# Altium PCB bbr18_pc_battery_board.PcbDoc
Units mm, origin at the board's own origin, x right, y up, seen from the top; angles counter-clockwise.
Board outline 57.41 x 45.19 mm, 2 copper layers (Top Layer, Bottom Layer), stack 1.571 mm thick; 45 components, 38 nets, 183 pads, 109 vias.
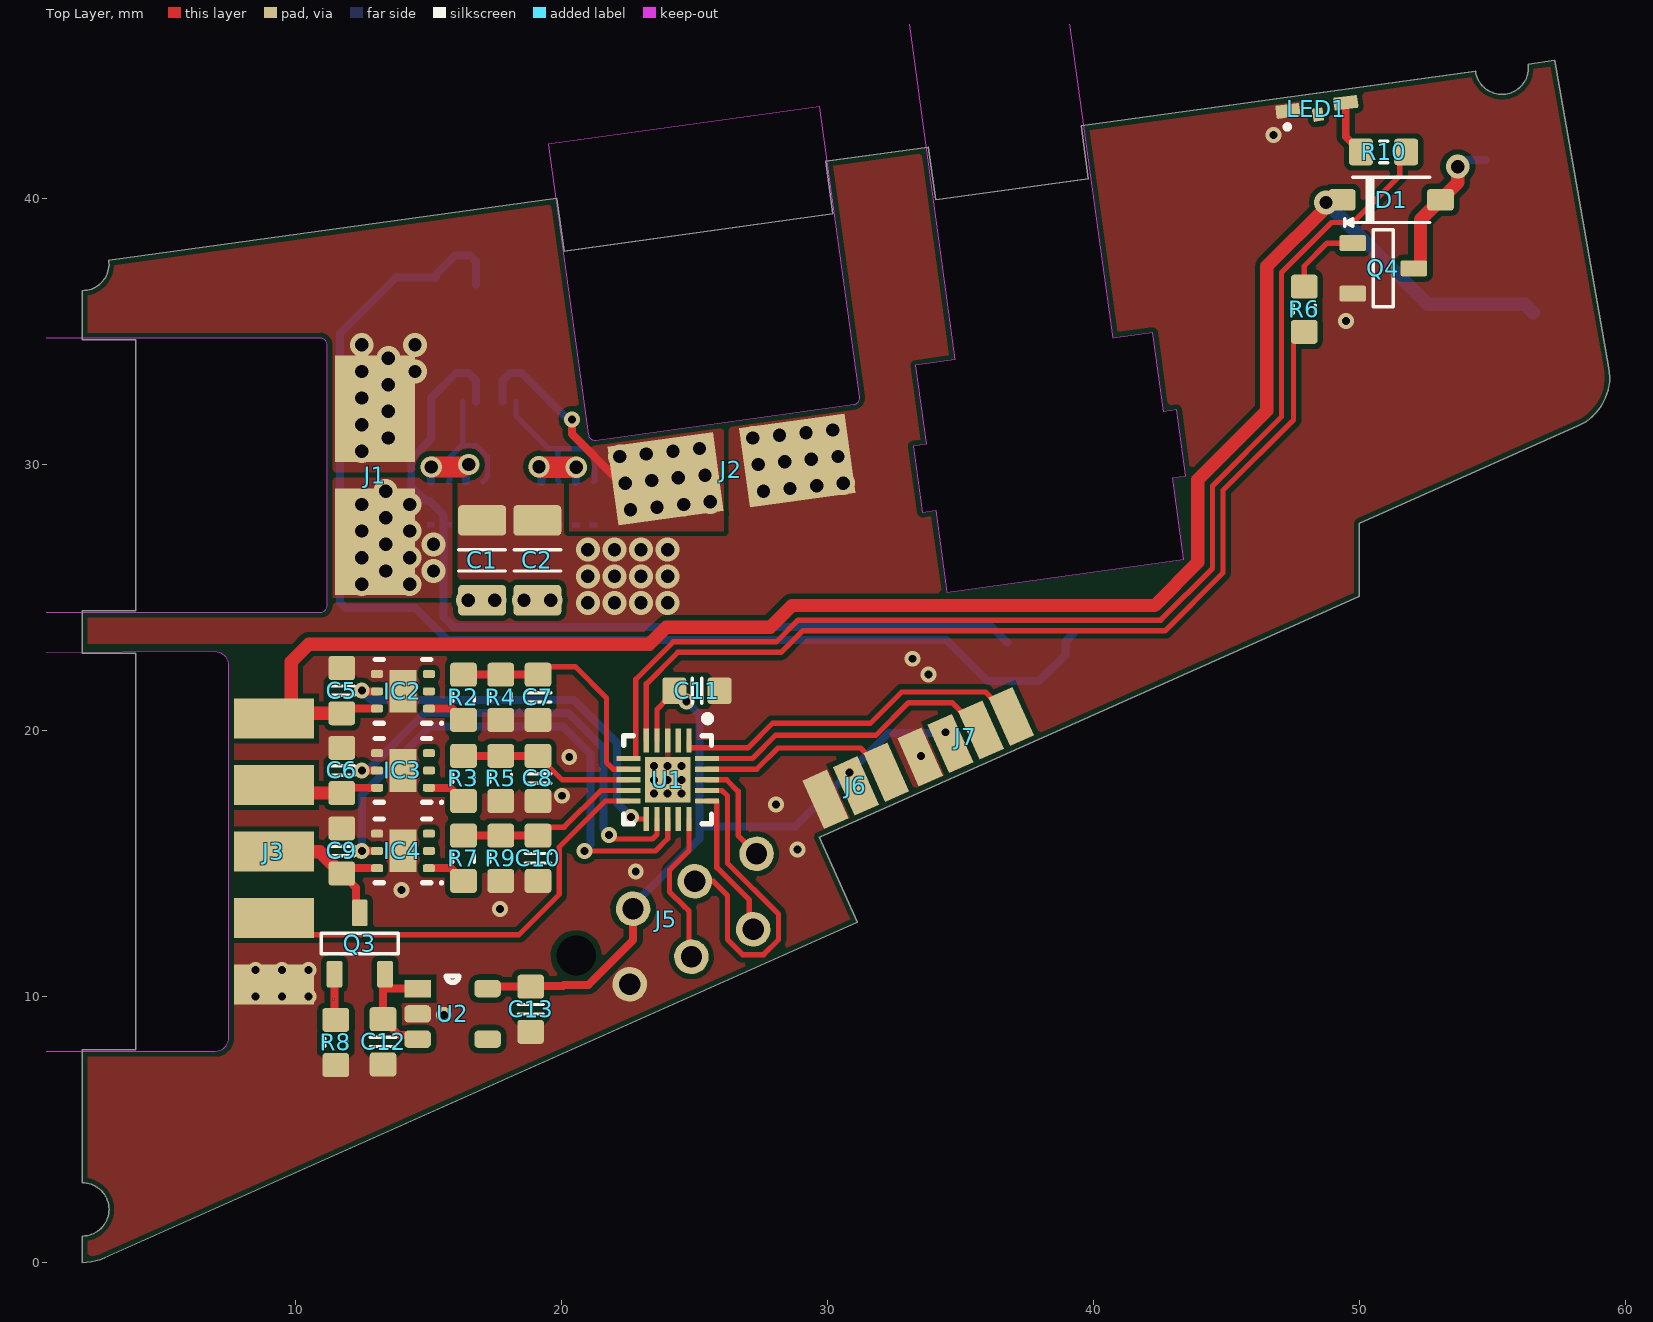
[diagram p0: Top Layer view]
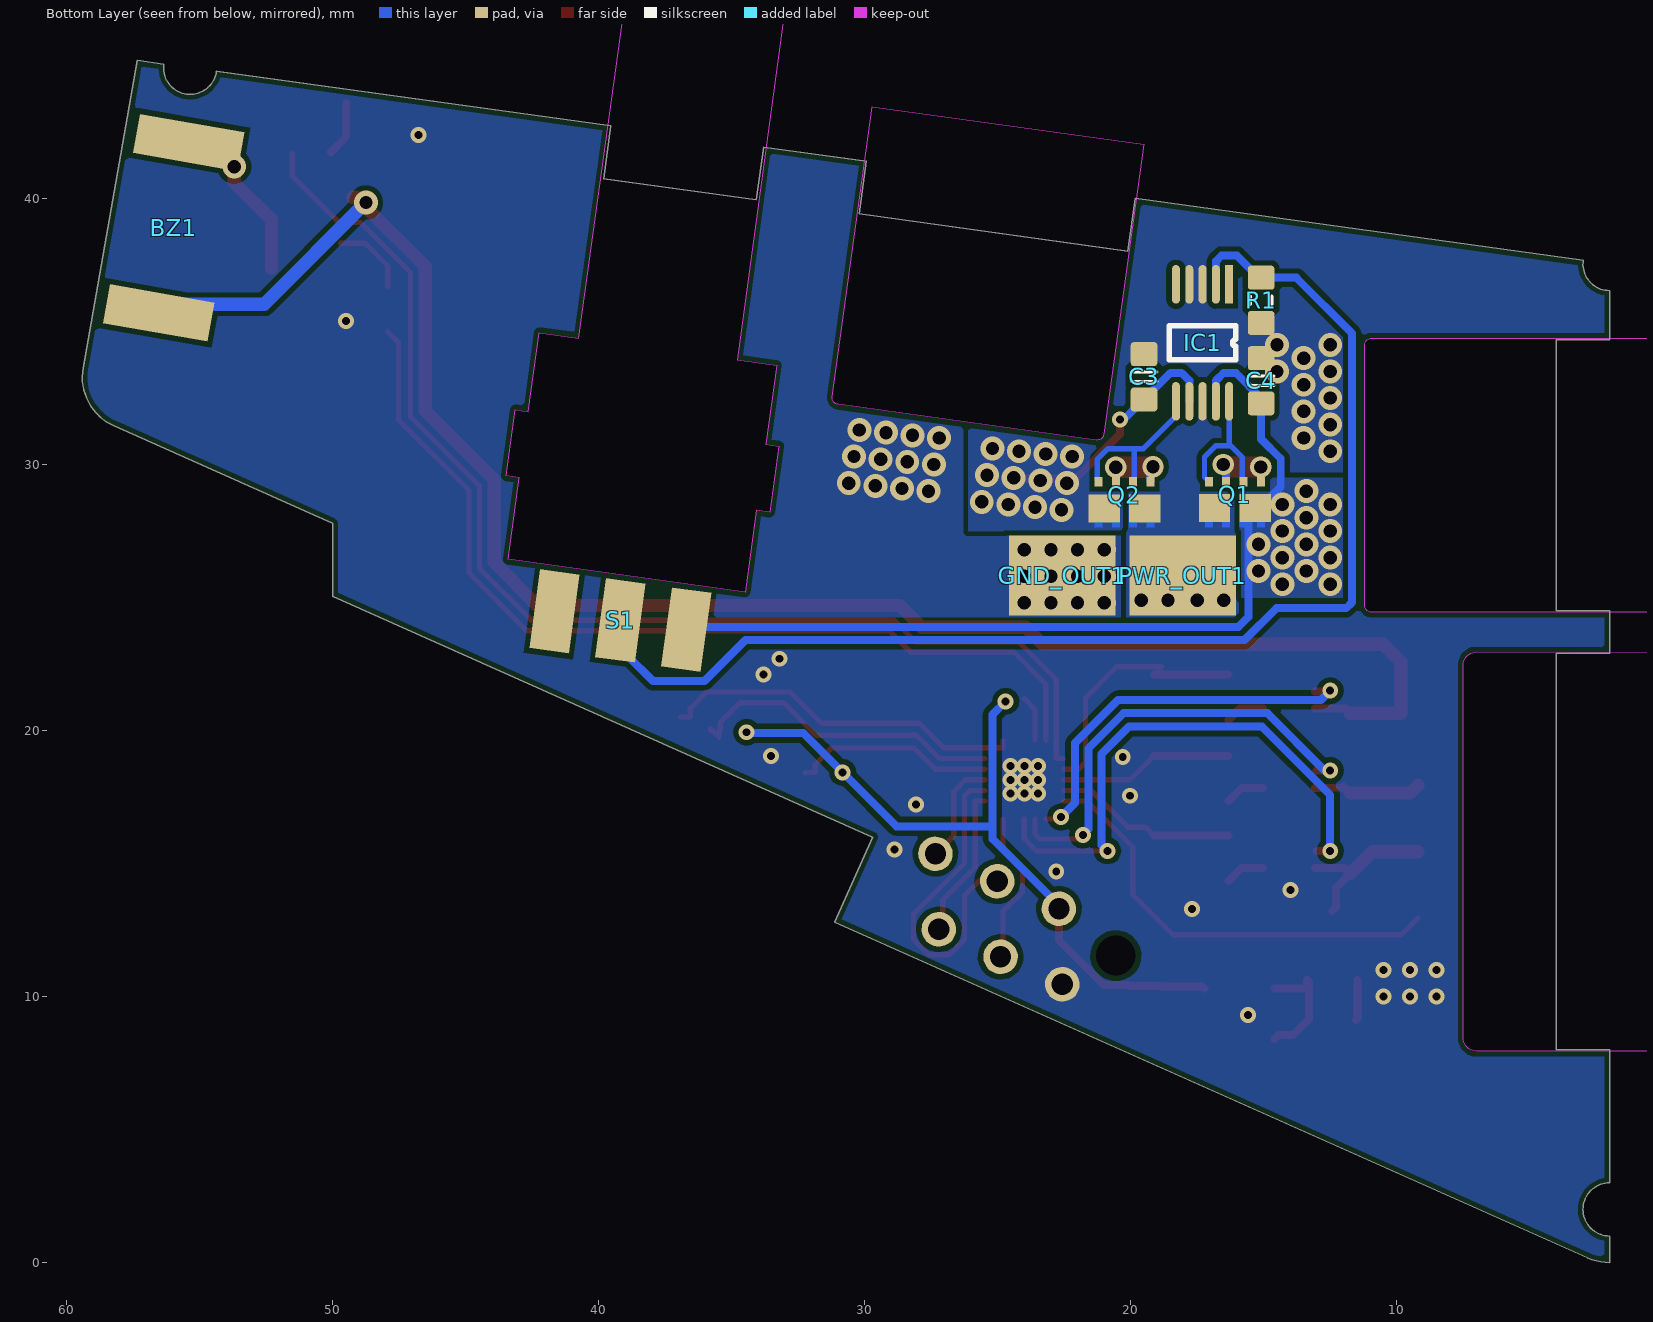
[diagram p1: Bottom Layer view, seen from below]

## Layer stack, top to bottom
Top Solder: solder mask 0.0102, Solder Resist, Dk 3.5
Top Layer: signal copper 0.0356
Dielectric 1: dielectric 1.5, FR-4, Dk 4.8
Bottom Layer: signal copper 0.0356
Bottom Solder: solder mask 0.0102, Solder Resist, Dk 3.5

## Board outline
2,0 ccw(c2,2) 2.815,0.173 31.127,12.8 29.701,15.997 50,25.05 50,27.787 58.224,31.455 ccw(c57.41,33.282) 59.379,33.629 57.341,45.192 56.349,45.055 cw(c55.358,44.918) 54.367,44.781 54.368,44.781 39.543,42.731 39.817,40.75 34.071,39.955 33.797,41.936 29.934,41.402 30.208,39.421 20.104,38.024 19.83,40.005 2.991,37.677 cw(c2,37.54) 2,36.54 2,34.7 4,34.7 4,24.5 2,24.5 2,22.9 4,22.9 4,8 2,8 2,3 cw(c2,2) 2,1

## Design rules (kind name [scope] priority, off if disabled: settings)
BoardOutlineClearance [All] p1: gap=0.2 ignorepadtopadclearanceinfootprint=FALSE except(0: Arc-SplitContinuation Track-SplitContinuation SMDPad-SplitContinuation THPad-SplitContinuation Via-SplitContinuation Fill-SplitContinuation Poly-SplitContinuation Region-SplitContinuation Text-SplitContinuation)
Clearance [All] p1: gap=0.2 ignorepadtopadclearanceinfootprint=TRUE except(0: Arc-Hole Track-Hole SMDPad-Hole THPad-Hole Via-Hole Fill-Hole Poly-Hole Region-Hole Text-Hole)
ComponentClearance ComponentClearanceIgnore [HasFootprint('PADS-3-1020') or HasFootprint('PADS-4-1020')] p1: gap=0 collisioncheckmode=3 verticalgap=0 showdistances=FALSE
ComponentClearance [All] p2: gap=0.2 collisioncheckmode=3 verticalgap=0.2 showdistances=FALSE
HoleToHoleClearance [All] p1: gap=0.2 allowstackedmicrovias=TRUE
PolygonConnect [All] p1: connectstyle=Direct reliefconductorwidth=0.254 reliefentries=4 polygonreliefangle="90 Angle" airgapwidth=0.254
RoomDefinition lipo_alarm [InComponentClass('lipo_alarm')] p1: confinementstyle=ConfineIn formatcopy=TRUE lockcomponents=FALSE outline -21.2,-24 128.9,-24 128.9,82.2 -21.2,82.2
RoomDefinition bbr18_pc_battery_board [InComponentClass('bbr18_pc_battery_board')] p2: confinementstyle=ConfineIn formatcopy=TRUE lockcomponents=FALSE outline -19,-22 125,-22 125,77 -19,77
RoutingVias [All] p1: holewidth=0.3 width=0.6 viastyle="Through Hole" minholewidth=0.3 minwidth=0.6 maxholewidth=5 maxwidth=10
SolderMaskExpansion SolderMaskExpansionTentedVia [IsVia] p1: expansion=-5
SolderMaskExpansion [All] p2: expansion=0.102
Width [All] p1: maxlimit=10 minlimit=0.2 preferedwidth=0.3
28 further rules are at their usual default settings.

## Classes and differential pairs
component class lipo_alarm: BZ1 C5 C6 C7 C8 C9 C10 C11 C12 C13 D1 IC2 IC3 IC4 J3 J5 J6 J7 LED1 Q3 Q4 R2 R3 R4 R5 R6 R7 R8 R9 R10 U1 U2
component class bbr18_pc_battery_board: C1 C2 C3 C4 GND_OUT1 IC1 J1 J2 PWR_OUT1 Q1 Q2 R1 S1

## Components (designator, comment, footprint, x,y, rotation, side; value= is the part's Value field where it differs from the comment)
BZ1 "KXG1212" KXG1212 59,36.135 r10 bottom
C1 "10u 25V" CAPC3216X180N 17.025,26.4 r90 top value=10uF
C2 "10u 25V" CAPC3216X180N 19.1,26.4 r90 top value=10uF
C3 "100n" CAPC1608X90N 19.5,33.3 r90 bottom value=10n
C4 "100n" CAPC1608X90N 15.1,33.15 r90 bottom value=10n
C5 "1u" CAPC1608X90N 11.75,21.5 r90 top value=1µ
C6 "1u" CAPC1608X90N 11.75,18.5 r90 top value=1uF
C7 "100n" CAPC1608X90N 19.125,21.25 r270 top
C8 "100n" CAPC1608X90N 19.125,18.2 r270 top
C9 "1u" CAPC1608X90N 11.75,15.475 r90 top value=1µ
C10 "100n" CAPC1608X90N 19.125,15.2 r270 top
C11 "100n" CAPC1608X90N 25.1,21.5 r0 top
C12 "1u" CAPC1608X90N 13.3,8.3 r270 top
C13 "1u" CAPC1608X90N 18.85,9.525 r270 top
D1 "20V; 1A" SOD123 51.2,39.95 r0 top
GND_OUT1 "HEADER-1" POWER-PAD-4x3 22.573,25.825 r0 bottom
IC1 "LTC4416" MSOP-10 17.3,34.575 r270 bottom
IC2 "TPS22810DRVT" WSON-6 14.05,21.475 r180 top
IC3 "TPS22810DRVT" WSON-6 14.05,18.5 r180 top
IC4 "TPS22810DRVT" WSON-6 14.05,15.475 r180 top
J1 "XT30U" XT30U-PCB-RA-CUTOUT 11.2,29.6 r180 top locked
J2 "XT30U" XT30U-PCB-RA-CUTOUT 26.15,31.593 r97.87 top locked
J3 "BATTERY" JST-XH-5-TH-PCB-CUTOUT 7,20.45 r270 top
J5 "HEADER-6" MICRO-MATCH-FOB-06 22.573,10.463 r204 top
J6 "UPDI" PADS-3-1020 29.933,17.417 r24 top
J7 "UART" PADS-4-1020 33.491,19.008 r24 top
LED1 "Red" LED-0805S-SIDELED-2.1X0.6X1.0 48.4,43.449 r7.87 top
PWR_OUT1 "HEADER-1" POWER-PAD-4x3 18.048,25.825 r180 bottom
Q1 "SI5997DU" POWERPAK-CHIPFET-DUAL 16.086,29.534 r180 bottom
Q2 "SI5997DU" POWERPAK-CHIPFET-DUAL 20.237,29.528 r180 bottom
Q3 "BSS84" SOT23-3 12.425,11.995 r90 top
Q4 "NPM" SOT23-3 50.9,37.375 r0 top
R1 "Thick Film" RESC1608X55N 15.1,36.175 r270 bottom value=100k
R2 "3k" RESC1608X55N 16.325,21.25 r90 top value=20M
R3 "2k" RESC1608X55N 16.325,18.2 r90 top value=20M
R4 "1k" RESC1608X55N 17.725,21.25 r270 top value=20M
R5 "1k" RESC1608X55N 17.725,18.2 r270 top value=20M
R6 "1.5k?" RESC1608X55N 47.931,35.838 r90 top value=20M
R7 "1k" RESC1608X55N 16.325,15.2 r90 top value=20M
R8 "100k" RESC1608X55N 11.525,8.275 r90 top value=20M
R9 "1k" RESC1608X55N 17.725,15.2 r270 top value=20M
R10 "1k" RESC1608X55N 50.912,41.75 r180 top value=20M
S1 "SW-SPDT" A12AP-PCB-CUTOUT 38.95,25.825 r187.87 bottom
U1 "ATTINY416" QFN40P300X300X90_HS-21M 24,18.15 r270 top locked
U2 "LDO-SOT23-5" SOT23-5 14.6,10.3 r0 top

## Footprints (in the part's own frame and the unit in brackets; to place one, negate y for a bottom-side part, rotate by r counter-clockwise, add the part's x,y. Pads: shape width x height; smd on the part's side, far side on the other; paste and mask are expansions set on the pad)
A12AP-PCB-CUTOUT [mm] "A12AP-PCB-CUTOUT"
  rect 1.5x3 smd: 1(-2.5,-1.7) 2(0,-1.7) 3(2.5,-1.7)
  Keep-Out Layer board cut-out: -4.5,0 -4.5,3.1 -5,3.1 -5,5.6 -4.5,5.6 -4.5,8.6 -3,8.6 -3,24 2.969,24 3.001,8.6 4.5,8.6 4.5,5.6 5,5.6 5,3.1 4.5,3.1 4.5,0
  body extent -4.9,-3.1 4.9,21.79, height 2.3
CAPC1608X90N [mm] "Chip Capacitor, Body 1.6x0.8mm, EIA 0603, IPC Medium Density"
  round 0.254 on Mech15: 0(0,0)
  rrect25% 0.9x1 smd: 1(-0.85,0) 2(0.85,0)
  Top Layer pour cut-out: -0.6,0.5 -0.4,0.7 0.4,0.7 0.6,0.5 0.6,-0.5 0.4,-0.7 -0.4,-0.7 -0.6,-0.5
  silkscreen extent -0.18,-0.48 0.18,0.48, body extent -0.85,-0.45 0.85,0.45, height 0.89
CAPC3216X180N [mm] "Chip Capacitor, Body 3.2x1.6mm, 1.8mm H, EIA 1206, IPC Medium Density"
  round 0.508 on Mech15: 0(0,0)
  rrect25% 1.15x1.8 smd: 1(-1.5,0) 2(1.5,0)
  silkscreen extent -0.4,-0.88 0.4,0.88, body extent -1.7,-0.9 1.7,0.9, height 1.8
JST-XH-5-TH-PCB-CUTOUT [mm]
  rect 1.5x3 smd: 1(0,2.2) 2(2.5,2.2) 3(5,2.2) 4(7.5,2.2) 5(10,2.2)
  Keep-Out Layer board cut-out: -2.473,-7 12.5,-7 12.5,0 12.462,0.191 12.354,0.354 12.191,0.462 12,0.5 12,0.5 -2.001,0.5 -2.194,0.461 -2.358,0.352 -2.467,0.187 -2.505,-0.006 -2.505,-0.006
  body extent -2.45,-7 12.45,3.4, height 2.71
KXG1212 [mm]
  rect 4x1.5 smd: 1(-2.5,0) 2(-2.5,-6.5)
  body extent -5.5,-9.25 9.5,2.75, height 6.3
LED-0805S-SIDELED-2.1X0.6X1.0 [mm] "Lite-On Inc PLCC Side LED"
  round 0.508 on Mech15: 0(0,0)
  rrect25% 0.9x0.5 smd: A(1.1,0) K(-1.1,0)
  rrect25% 0.4x0.5 smd: B(0,-0.3)
  Top Layer pour cut-out: -0.508,0.3 0.508,0.3 0.508,-0.3 -0.508,-0.3
  silkscreen extent -1.28,-0.68 -1.12,-0.52, body extent -1.1,-0.3 1.1,0.8, height 0.7
MICRO-MATCH-FOB-06 [mm]
  round 1.3 hole 0.8: 1(0,0) 2(-1.27,-2.54) 3(-2.54,0) 4(-3.81,-2.54) 5(-5.08,0) 6(-6.35,-2.54)
  round 0 hole 1.5 unplated: drill(1.4,-1.8)
  body extent -7.95,-3.77 1.6,1.23, height 4
MSOP-10 [mm]
  rect 1.45x0.3 smd: 1(-2.2,1)
  oval 1.45x0.3 smd: 2(-2.2,0.5) 3(-2.2,0) 4(-2.2,-0.5) 5(-2.2,-1) 6(2.2,-1) 7(2.2,-0.5) 8(2.2,0) 9(2.2,0.5) 10(2.2,1)
  silkscreen extent -0.64,-1.25 0.64,1.25, body extent -2.47,-1.5 2.43,1.5, height 1.15
PADS-3-1020 [mm]
  rect 1x2 smd: 1(0,0) 2(1.25,0) 3(2.5,0)
PADS-4-1020 [mm]
  rect 1x2 smd: 1(0,0) 2(1.25,0) 3(2.5,0) 4(3.75,0)
POWER-PAD-4x3 [mm]
  rect 4x3 smd: 1(0,0)
POWERPAK-CHIPFET-DUAL [mm]
  rect 1.175x1.05 smd: D1(0.763,-1.175) D2(-0.763,-1.175)
  rect 0.3x0.35 smd: G1(0.325,-0.175) G2(-0.975,-0.175) S1(0.975,-0.175) S2(-0.325,-0.175)
  Top Layer region: 0.825,-1.7 1.125,-1.7 1.125,-1.9 0.825,-1.9
  Top Layer region: 0.175,-1.7 0.475,-1.7 0.475,-1.9 0.175,-1.9
  Top Layer region: -0.475,-1.7 -0.175,-1.7 -0.175,-1.9 -0.475,-1.9
  Top Layer region: -1.125,-1.7 -0.825,-1.7 -0.825,-1.9 -1.125,-1.9
  body extent -1.5,-1.9 1.5,0, height 0.75
QFN40P300X300X90_HS-21M [mm] "QFN, 20-Leads, Body 3,00x3,00mm, Pitch 0,40mm, Thermal Pad 1,70x1,70mm, IPC Low Density"
  rect 0.9x0.2 smd: 1(-1.475,0.8) 2(-1.475,0.4) 3(-1.475,0) 4(-1.475,-0.4) 5(-1.475,-0.8) 11(1.475,-0.8) 12(1.475,-0.4) 13(1.475,0) 14(1.475,0.4) 15(1.475,0.8)
  rect 0.2x0.9 smd: 6(-0.8,-1.475) 7(-0.4,-1.475) 8(0,-1.475) 9(0.4,-1.475) 10(0.8,-1.475) 16(0.8,1.475) 17(0.4,1.475) 18(0,1.475) 19(-0.4,1.475) 20(-0.8,1.475)
  rect 1.7x1.7 smd: 21(0,0)
  silkscreen extent -2.42,-1.65 1.65,1.65, body extent -1.5,-1.5 1.5,1.5, height 0.9
RESC1608X55N [mm] "Chip Resistor, Body 1.6x0.8mm, EIA 0603, IPC Medium Density"
  round 0.254 on Mech15: 0(0,0)
  rrect25% 0.9x1 smd: 1(-0.85,0) 2(0.85,0)
  Top Layer pour cut-out: -0.6,0.5 -0.4,0.7 0.4,0.7 0.6,0.5 0.6,-0.5 0.4,-0.7 -0.4,-0.7 -0.6,-0.5
  silkscreen extent -0.15,-0.41 0.15,0.41, body extent -0.87,-0.47 0.88,0.48, height 0.54
SOD123 [mm] "SOD-123; 2 Leads; Body 2.7 x 1.6 mm, (LxW)"
  round 0.508 on Mech15: 0(0,0)
  rrect25% 1x0.8 smd: A(1.85,0) K(-1.85,0)
  silkscreen extent -1.75,-1 1.45,0.85, body extent -1.95,-0.9 1.95,0.9, height 1.18
SOT23-3 [mm] "SOT23, 3 pin"
  round 0.5 on Mech15: 0(0,0)
  rrect25% 1x0.6 smd: 1(-1.15,0.95) 2(-1.15,-0.95) 3(1.15,0)
  silkscreen extent -0.38,-1.45 0.38,1.45, body extent -1.4,-1.45 1.4,1.45, height 1.29
SOT23-5 [mm]
  rect 1x0.66 smd: 1(0,0)
  rrect50% 1x0.66 smd: 2(0,-0.95) 3(0,-1.9) 4(2.63,-1.9) 5(2.63,0)
  silkscreen extent 1.08,0.24 1.55,0.48, body extent 0.1,-2.47 2.6,0.53, height 1.11
WSON-6 [mm] "SON, 6-Leads, Body 2,00x2,00mm, Pitch 0,65mm, Thermal Pad 1,60x1mm, IPC Medium Density"
  rrect50% 0.45x0.3 smd: 1(-0.975,0.65) 2(-0.975,0) 3(-0.975,-0.65) 4(0.975,-0.65) 5(0.975,0) 6(0.975,0.65)
  rect 1x1.6 smd: 7(0,0)
  silkscreen extent -1.5,-1.2 1.05,1.25, body extent -1.01,-1 1.01,1, height 0.8
XT30U-PCB-RA-CUTOUT [mm]
  rect 3x4 smd: 1(-1.8,-2.5) 2(-1.8,2.5)
  Keep-Out Layer board cut-out: 11.25,-5.15 11.25,5.15 0.25,5.15 0.125,5.116 0.034,5.025 0,4.9 0,4.9 0,-4.9 0.034,-5.025 0.125,-5.116 0.25,-5.15 0.25,-5.15
  body extent -2.5,-5.1 11.2,5.1, height 2.82

## Part data
BZ1: library part BUZZER
C1 C2: library part CAPC_6n8_1206_NP0_50V, "Capacitor SMD Cer 6.8nF 5% 50V NP0 1206", Manufacturer 1="TDK Corporation", Manufacturer Part Number 1=C3216C0G1H682J/0.60, Package / Case="1206 (3216 metric)", Ratings=25V, Supplier Part Number 1=445-4005-1-ND, Tolerance=±5%, Material="Ceramic NP0", SCDType=spec, Supplier 1=Digi-Key
C3 C4: library part CAPC_10n_0603_X7R_50V_10%, "Capacitor SMD Cer 10nF 10% 50V X7R 0603", Manufacturer 1="TDK Corporation", Manufacturer 2="AVX Corporation", Manufacturer Part Number 1=C1608X7R1H103K, Manufacturer Part Number 2=06035C103KAT2A, Package / Case="0603 (1608 metric)", Ratings="50V; X7R", Supplier Part Number 1=445-1311-1-ND, Tolerance=±10%, ComponentLink1Description=http://product.tdk.com/capacitor/mlcc/en/documents/mlcc_commercial_general_en.pdf, ComponentLink1URL=http://product.tdk.com/capacitor/mlcc/en/documents/mlcc_commercial_general_en.pdf, ComponentLink2Description=http://www.avx.com/docs/Catalogs/cx7r.pdf, ComponentLink2URL=http://www.avx.com/docs/Catalogs/cx7r.pdf, Material=ceramic, SCDType=spec, Supplier 1=Digi-Key, Supplier 2=Digi-Key, Supplier Part Number 2=478-1227-1-ND
C5 C9: library part CAPC_1u_0603_X7R_16V_10%, "Capacitor SMD Cer 1uF 10% 16V X7R 0603", Manufacturer 1="TDK Corporation", Manufacturer Part Number 1=C1608X7R1C105K, Package / Case="0603 (1608 metric)", Ratings="16V; X7R", Supplier Part Number 1=445-1604-1-ND, Tolerance=±10%, ComponentLink1Description=http://product.tdk.com/capacitor/mlcc/en/documents/mlcc_commercial_general_en.pdf, ComponentLink1URL=http://product.tdk.com/capacitor/mlcc/en/documents/mlcc_commercial_general_en.pdf, Material=ceramic, SCDType=spec, Supplier 1=Digi-Key
C6: library part CAPC_100n_0603_X7R_50V_10%, "Capacitor SMD Cer 1uF 10% 50V X7R 0603", Manufacturer 1="AVX Corporation", Manufacturer 2="TDK Corporation", Manufacturer Part Number 1=06035C104KAT2A, Manufacturer Part Number 2=C1608X7R1H104K, Package / Case="0603 (1608 Metric)", Ratings="50V; X7R", Supplier Part Number 1=478-5052-1-ND, Tolerance=±10%, ComponentLink1Description=http://www.avx.com/docs/Catalogs/cx7r.pdf, ComponentLink1URL=http://www.avx.com/docs/Catalogs/cx7r.pdf, ComponentLink2Description=http://product.tdk.com/capacitor/mlcc/en/documents/mlcc_commercial_general_en.pdf, ComponentLink2URL=http://product.tdk.com/capacitor/mlcc/en/documents/mlcc_commercial_general_en.pdf, Material=ceramic, SCDType=spec, Supplier 1=Digi-Key, Supplier 2=Digi-Key, Supplier Part Number 2=445-1314-1-ND
C7 C8 C10 C11: library part CAPC_100n_0603_X7R_50V_10%, "Capacitor SMD Cer 100nF 10% 50V X7R 0603", Manufacturer 1="AVX Corporation", Manufacturer 2="TDK Corporation", Manufacturer Part Number 1=06035C104KAT2A, Manufacturer Part Number 2=C1608X7R1H104K, Package / Case="0603 (1608 Metric)", Ratings="50V; X7R", Supplier Part Number 1=478-5052-1-ND, Tolerance=±10%, ComponentLink1Description=http://www.avx.com/docs/Catalogs/cx7r.pdf, ComponentLink1URL=http://www.avx.com/docs/Catalogs/cx7r.pdf, ComponentLink2Description=http://product.tdk.com/capacitor/mlcc/en/documents/mlcc_commercial_general_en.pdf, ComponentLink2URL=http://product.tdk.com/capacitor/mlcc/en/documents/mlcc_commercial_general_en.pdf, Material=ceramic, SCDType=spec, Supplier 1=Digi-Key, Supplier 2=Digi-Key, Supplier Part Number 2=445-1314-1-ND
C12 C13: library part CAPC_2u2_0603_10V_10%, "Capacitor SMD Cer 2.2uF 10% 10V X5R 0603", Manufacturer 1="AVX Corporation", Manufacturer Part Number 1=0603ZD225KAT2A, Package / Case="0603 (1608 metric)", Ratings="10V; X5R", Supplier Part Number 1=478-6212-1-ND, Tolerance=±10%, ComponentLink1Description=http://www.avx.com/docs/Catalogs/cx5r.pdf, ComponentLink1URL=http://www.avx.com/docs/Catalogs/cx5r.pdf, Material=ceramic, SCDType=spec, Supplier 1=Digi-Key
D1: library part DIODE_SCHOTTKY_40V_1A, "Diode Schottky SMD 20V 1A SOD123", Manufacturer 1="Diodes Inc", Manufacturer Part Number 1=1N5819HW-7-F, Package / Case=SOD123, Ratings="40V; 1A", Supplier Part Number 1=1N5819HW-FDICT-ND, Diode Type=Schottky, Material=Si, Mounting Type="Surface Mount", SCDType=spec, Supplier 1=Digi-Key
IC1: "PowerPath Controller, 3.6-36V, MSOP-10, LTC4416, Linear Technology", Case/Package=MSOP-10, Manufacturer="Analog Devices / Linear Technology", Manufacturer Part Number=LTC4416EMS#PBF, Operating Temperature Range="-40°C .. 85°C", Supplier Part Number 1=584-LTC4416EMS#PBF, Supply Voltage Range="3.6V .. 36V", ComponentLink4Description=Datasheet, ComponentLink4URL=https://datasheet.ciiva.com/1960/17899-1960765.pdf, Number of Drivers=2, Supplier 1=Mouser, Supplier 2=TME, Supplier Part Number 2=LTC4416EMSPBF
IC2 IC3 IC4: "Power Load Switch, 18Vin, 3A, 0.079R, WSON-6, High Side,  TPS22810, TEXAS INSTRUMENTS", Input Voltage Range="2.7V .. 18V", Manufacturer="Texas Instruments", On-Resistance=0.079R, Operating Temperature Range="-40°C .. 105°C", Package=WSON-6, Supplier Part Number 1=2769481, ComponentLink1Description=Datasheet, ComponentLink1URL=http://www.ti.com/lit/ds/symlink/tps22810.pdf, Manufacturer Part Number=TPS22810DRVT, Number of Channels=1, Supplier 1=Farnell, Supplier 2=Mouser, Supplier Part Number 2=595-TPS22810DRVT
J3: library part HEADER-5
J6: library part HEADER-3
J7: library part HEADER-4
LED1: library part LED_SMD_RED_0805RA_250mcd, "LED SMD SIDELED Red 630nm 250mcd 0805", Manufacturer 1="Kingbright Corp", Manufacturer Part Number 1=APA2106SURCK, Package / Case="2.1x0.6x1.0mm SIDELED", Ratings="250 mcd; 630 nm", Supplier Part Number 1=754-1060-1-ND, Color=Red, Material=Al-InGaN, SCDType=spec, Supplier 1=Digi-Key
Q1 Q2: "MOSFET, DUAL P-CHANNEL, 30Vin, 6A, 0.054R, SI5997DU-T1-GE3, PowerPAK ChipFET Dual", Continuous Drain Current (ID)=5.1A, Drain to Source Voltage (Vdss)=-30V, Gate to Source Voltage (Vgs)=20V, Manufacturer="Vishay Siliconix", Manufacturer Part Number=SI5997DU-T1-GE3, Max Power Dissipation=10.4W, Power Dissipation=2.3W, Supplier Part Number 1=2056727, Threshold Voltage=-1.2V, ComponentLink1Description=Datasheet, ComponentLink1URL=https://datasheet.ciiva.com/11159/si5997du-11159553.pdf, Element Configuration=Dual, Rds On Max=54mR, Supplier 1=Farnell, Supplier 2=Mouser, Supplier Part Number 2=78-SI5997DU-T1-GE3
Q3: library part MOSFET_BSS84, "MOSFET SMD P-CH 50V 130mA SOT23-3", Current - Continuous Drain (Id) @ 25° C=130mA, Drain to Source Voltage (Vdss)=50V, Input Capacitance (Ciss) @ Vds="73pF @ 25V", Manufacturer 1="Fairchild Semiconductor", Package / Case=SOT23-3, Power - Max=360mW, Ratings="50V; 130mA", Supplier Device Package=SOT-23, Supplier Part Number 1=BSS84CT-ND, ComponentLink1Description=http://www.fairchildsemi.com/ds/BS/BSS84.pdf, ComponentLink1URL=http://www.fairchildsemi.com/ds/BS/BSS84.pdf, FET Feature="Logic Level Gate", FET Type="MOSFET P-Channel, Metal Oxide", Gate Charge (Qg) @ Vgs="1.3nC @ 5V", Manufacturer Part Number 1=BSS84, Material="Metal Oxide", Rds On (Max) @ Id, Vgs="10 Ohm @ 100mA, 5V", SCDType=undef, Supplier 1=Digi-Key, Vgs(th) (Max) @ Id="2V @ 1mA"
Q4: library part NPN_FMMT617TA, "Transistor SMD NPN 15V 3A SOT-23", Manufacturer 1=Diodes/Zetex, Manufacturer Part Number 1=FMMT617TA, Package / Case=SOT-23, Ratings="15V; 3A; 625mW", Supplier Part Number 1=FMMT617CT-ND, SCDType=spec, Supplier 1=Digi-Key
R1: library part RES_100K_0603_1%, "Resistor SMD chip 100k Ohm 0.1W 1% 0603", Manufacturer 1=Vishay/Dale, Manufacturer Part Number 1=CRCW0603100KFKEA, Package / Case="0603 (2012 metric)", Ratings=1/10W, Supplier Part Number 1=541-100KHCT-ND, Tolerance=±1%, SCDType=spec, Supplier 1=Digi-Key
R2 R3 R4 R5 R6 R7 R8 R9 R10: library part RES_1K_0603_5%, "Resistor SMD chip 1k Ohm 0.1W 5% 0603", Manufacturer 1=Yageo, Manufacturer 2="Vishay Dale", Manufacturer Part Number 1=RC0603JR-071KL, Manufacturer Part Number 2=CRCW06031K00JNEA, Package / Case="0603 (1608 metric)", Ratings="1/10 W", Supplier Part Number 1=311-1.0KGRCT-ND, Tolerance=±5%, ComponentLink1Description=http://www.yageo.com/documents/recent/PYu-RC0603_51_RoHS_L_4.pdf, ComponentLink1URL=http://www.yageo.com/documents/recent/PYu-RC0603_51_RoHS_L_4.pdf, ComponentLink2Description=http://www.vishay.com/doc?20008, ComponentLink2URL=http://www.vishay.com/doc?20008, Material="Thick Film", SCDType=spec, Supplier 1=Digi-Key, Supplier 2=Digi-Key, Supplier Part Number 2=541-1.0KGCT-ND

## Via types
v1: diameter 0.9, hole 0.5, Top Layer to Bottom Layer, 67 vias
v2: diameter 0.6, hole 0.3, Top Layer to Bottom Layer, 38 vias
v3: diameter 0.8, hole 0.5, Top Layer to Bottom Layer, 4 vias

## Nets (pads, with @x,y where several pads share a name; then routed paths per layer and width w, separated by ;. In a path a pad name is that pad's centre, name@x,y a point inside that pad or via, vN(x,y) a via of type N, cw(c..) or ccw(c..) an arc to the next point about the centre after c; other vN are vias at no path point)
5V: C11.1 C13.1 J5.2 J6.2 J7.2 U1.4 U2.5 | length 28.9
  Top Layer w0.2: U1.4 23.6,20.8 C11.1@24,21.2
  Top Layer w0.3: U2.5 17.305,10.375 C13.1 18.875,10.4 20.068,10.4 20.106,10.438 21.017,10.438 22.7,12.121 J5.2
  Bottom Layer w0.3: J5.2 22.7,13.43 25.2,15.93 25.2,20.6 v2(24.7,21.1) ; 25.25,16.4 28.8,16.4 v2(30.827,18.426) 32.3,19.9 34.436,19.9 v2(34.436,19.937)
ADC2: C10.1 R7.2 R9.1 U1.9 | length 6.9
  Top Layer w0.2: C10.1 19.444,16.369 20.106,16.369 21.488,17.75 U1.9
  Top Layer w0.3: R7.2 C10.1
ADC3: C8.1 R3.2 R5.1 U1.8 | length 6.6
  Top Layer w0.2: C8.1 20.025,18.15 U1.8
  Top Layer w0.3: R3.2 C8.1
ADC4: C7.1 R2.2 R4.1 U1.7 | length 9.9
  Top Layer w0.2: C7.1 18.827,22.398 20.533,22.398 21.7,21.231 21.7,18.801 21.951,18.55 U1.7
  Top Layer w0.3: R2.2 C7.1
AUX+: C3.1 IC1.7 J2.2 Q2.D2 | length 9
  Top Layer w0.3: v2(20.4,31.7) 20.4,31.147 22.079,29.467 J2.2
  Bottom Layer w0.3: IC1.7 17.8,33.157 18.093,33.45 18.507,33.45 19.5,32.457 C3.1 20.25,31.7 v2(20.4,31.7)
  other v1: 22.6,28.3 23.6,28.4 24.6,28.5 25.6,28.6 22.4,29.3 23.4,29.4 24.4,29.5 25.4,29.6 22.2,30.3 23.2,30.4 24.2,30.5 25.2,30.6
BAT+: C4.1 IC1.9 J1.2 Q1.D1 S1.3 | length 33.7
  Bottom Layer w0.3: IC1.9 16.8,33.157 16.507,33.45 16.05,33.45 15.1,32.5 C4.1 15.1,30.959 14.361,30.22 14.361,29.167 14.874,28.654 15.028,28.654 15.291,28.391 Q1.D1 15.575,28.107 15.575,24.278 15.953,23.9 36.178,23.9 S1.3@36.775,23.303
  other v1: 12.5,25.5 14.3,25.5 13.4,26 15.2,26 12.5,26.5 14.3,26.5 13.4,27 15.2,27 12.5,27.5 14.3,27.5 13.4,28 12.5,28.5 14.3,28.5 13.4,29
BZ_PWM: R6.1 U1.5 | length 35.9
  Top Layer w0.2: U1.5 23.2,21.758 24.38,22.939 28.255,22.939 29.066,23.75 42.696,23.75 44.878,25.932 44.878,29.035 47.525,31.682 47.525,34.582 R6.1
EN1: IC1.2 R1.1 S1.2 | length 47.3
  Bottom Layer w0.3: R1.1@15.3,37.025 R1.1@15.18,37.025 ; IC1.2 16.8,37.645 16.595,37.85 16.005,37.85 R1.1@15.18,37.025 ; S1.2@39.251,23.646 38.95,23.344 38.95,22.85 37.96,21.86 36.024,21.86 34.484,23.4 15.725,23.4 14.525,24.6 11.9,24.6 11.7,24.8 11.675,24.825 11.675,34.925 13.775,37.025 R1.1 R1.1@15.18,37.025
EN_S2: IC4.5 U1.13 | length 20.5
  Top Layer w0.2: v2(20.875,15.476) 23.541,15.476 24,15.935 U1.13
  Top Layer w0.3: v2(12.501,15.476) IC4.5@13.025,15.476
  Bottom Layer w0.3: v2(12.501,15.476) 12.501,17.582 15.071,20.152 20.067,20.152 21.097,19.123 21.097,15.697 v2(20.875,15.476)
EN_S3: IC3.5 U1.12 | length 16.9
  Top Layer w0.2: v2(21.801,16.076) 21.952,15.925 23.424,15.925 23.6,16.101 U1.12
  Top Layer w0.3: v2(12.501,18.501) IC3.5@13.024,18.501
  Bottom Layer w0.3: v2(12.501,18.501) 12.713,18.501 14.864,20.652 20.274,20.652 21.597,19.33 21.597,16.304 v2@21.801,16.1
EN_S4: IC2.5 U1.11 | length 14.5
  Top Layer w0.2: v2@22.75,16.675 U1.11
  Top Layer w0.3: v2(12.501,21.501) 12.475,21.475 IC2.5
  Bottom Layer w0.3: v2(12.501,21.501) 12.849,21.152 20.481,21.152 22.097,19.537 22.097,17.278 v2(22.625,16.75)
G1: IC1.10 Q1.G1 Q1.G2 | length 5.4
  Bottom Layer w0.2: Q1.G1 15.811,29.409 15.811,30.277 16.244,30.709 16.324,30.709 ; IC1.10 16.3,30.733 16.324,30.709 ; Q1.G2 17.226,29.524 17.226,30.291 16.816,30.701 16.734,30.701 16.726,30.709 16.324,30.709
G2: IC1.6 Q2.G1 Q2.G2 | length 6.3
  Bottom Layer w0.2: IC1.6 18.3,31.825 19.528,30.597 19.862,30.597 ; Q2.G1 19.862,29.403 19.862,30.597 ; Q2.G2 21.262,29.403 21.262,30.187 20.852,30.597 19.862,30.597
GND: C5.2 C6.2 C7.2 C8.2 C9.2 C10.2 C11.2 C12.2 C13.2 IC2.4 IC2.7 IC3.4 IC3.7 IC4.4 IC4.7 J3.5 J5.1 J6.1 J7.1 LED1.K Q4.2 R4.2 R5.2 R8.1 R9.2 U1.3 U1.21 U2.2
  other v2: 15.6,9.3 8.5,10 9.5,10 10.5,10 8.5,11 9.5,11 10.5,11 17.7,13.3 14,14 22.8,14.7 28.875,15.525 28.066,17.225 20.025,17.55 24,17.639 24.519,17.639 23.494,17.642 23.483,18.15 24,18.15 24.519,18.15 23.483,18.664 24,18.664 24.525,18.675 20.3,19 33.525,19.05 33.8,22.1 33.2,22.7 49.5,35.4 46.775,42.382
LED_PWM: R10.1 U1.6 | length 45.7
  Top Layer w0.2: U1.6 22.8,18.95 22.8,21.924 24.215,23.339 28.089,23.339 28.9,24.15 42.531,24.15 44.478,26.098 44.478,29.201 47.075,31.797 47.075,37.222 48.953,39.1 49.766,39.1 51.525,40.859 R10.1@51.525,41.707
MISO: J5.5 U1.16 | length 5.8
  Top Layer w0.2: U1.16 25.85,17.35 25.85,14.847 27.071,13.626 27.071,12.671 J5.5
MOSI: J5.4 U1.17 | length 12.5
  Top Layer w0.2: J5.4 25.717,14.333 26.25,13.8 26.25,12.149 26.82,11.579 27.607,11.579 28.164,12.136 28.164,13.099 26.25,15.013 26.25,17.549 26.049,17.75 U1.17
NetBZ1_2: BZ1.2 D1.A Q4.3 | length 5.6
  Top Layer w0.5: Q4.3@52.3,37.375 52.3,39.2 53.7,40.6 v1(53.7,41.2)
  Bottom Layer w0.3: v1(53.7,41.2) 53.731,41.2 53.975,41.444 BZ1.2@54.751,41.444
NetIC2_1: IC2.1 R2.1 | length 1.5
  Top Layer w0.3: IC2.1 15.9,20.825 R2.1
NetIC3_1: IC3.1 R3.1 | length 1.5
  Top Layer w0.3: IC3.1 15.825,17.85 R3.1
NetIC4_1: IC4.1 R7.1 | length 1.5
  Top Layer w0.3: IC4.1 15.85,14.825 ; 15.85,14.825 R7.1
NetLED1_A: LED1.A R10.2 | length 2.1
  Top Layer w0.3: LED1.A 49.49,42.323 R10.2
NetQ1_S1: Q1.S1 Q1.S2 | length 2.7
  Top Layer w0.6: v3@16.261,29.909 v3@16.411,30.059
  Top Layer w0.8: v3(15.111,29.909) v3@16.261,29.909
  Bottom Layer w0.3: Q1.S1 v3(15.111,29.909) v3@15.111,30.034 ; Q1.S2 v3@16.411,30.022
  other v3: 16.526,30.001
NetQ2_S1: Q2.S1 Q2.S2 | length 2.7
  Top Layer w0.8: v3(19.162,29.922) 19.187,29.897 v3(20.562,29.897)
  Bottom Layer w0.3: Q2.S1 v3@19.262,29.997 ; Q2.S2 v3(20.562,29.897) v3@20.562,29.997
NetQ3_1: Q3.1 R8.2 | length 1.5
  Top Layer w0.3: Q3.1@11.475,10.625 11.475,9.175 R8.2
NetQ4_1: Q4.1 R6.2 | length 2.9
  Top Layer w0.2: R6.2 47.931,37.466 48.79,38.325 Q4.1@49.7,38.325
PGND: C1.2 C2.2 C3.2 C4.2 GND_OUT1.1 IC1.3 IC1.4 J1.1 J2.1 R1.2
  other v1: 21,24.8 22,24.8 23,24.8 24,24.8 21,25.8 22,25.8 23,25.8 24,25.8 21,26.8 22,26.8 23,26.8 24,26.8 27.6,29 28.6,29.1 29.6,29.2 30.6,29.3 27.4,30 28.4,30.1 29.4,30.2 30.4,30.3 12.5,30.5 13.5,31 27.2,31 28.2,31.1 29.2,31.2 30.2,31.3 12.5,31.5 13.5,32 12.5,32.5 13.5,33 12.5,33.5 14.5,33.5 13.5,34 12.5,34.5 14.5,34.5
PWR_OUT: C1.1 C2.1 IC1.8 PWR_OUT1.1 Q1.D2 Q2.D1
  other v1: 16.5,24.9 17.5,24.9 18.6,24.9 19.6,24.9
RX: J7.4 U1.1 | length 13.9
  Top Layer w0.2: U1.1 24.8,19.35 27.019,19.35 27.944,20.275 31.625,20.275 32.8,21.45 35.941,21.45 36.557,20.834 36.557,20.508 J7.4@36.942,20.508
S1: J3.4 U1.10 | length 16.7
  Top Layer w0.2: J3.4 9.825,12.325 18.408,12.325 19.925,13.842 19.925,15.622 21.653,17.35 U1.10
S2: C9.1 IC4.6 J3.3 Q3.3 | length 6
  Top Layer w0.3: Q3.3@12.425,13.225 12.275,13.375 12.275,14.1 C9.1 11.95,14.825 IC4.6
  Top Layer w0.5: J3.3 10.925,15.45 C9.1
S2_OUT: C12.1 Q3.2 U2.1 U2.3 | length 4.7
  Top Layer w0.3: U2.3 14.45,8.55 13.9,8.55 C12.1 13.3,10.55 13.375,10.625 13.375,10.3 U2.1
S3: C6.1 IC3.6 J3.2 | length 4.1
  Top Layer w0.3: C6.1 12,17.9 12.049,17.851 12.77,17.851 12.771,17.85 IC3.6
  Top Layer w0.5: J3.2 9.5,17.65 C6.1
S4: BZ1.1 C5.1 D1.K IC2.6 J3.1 | length 66.5
  Top Layer w0.3: C5.1 11.925,20.825 IC2.6
  Top Layer w0.5: C5.1 9.85,20.65 9.85,22.589 10.511,23.25 23.309,23.25 23.948,23.889 27.861,23.889 28.672,24.7 42.303,24.7 43.928,26.326 43.928,29.428 46.525,32.025 46.525,37.45 v1@48.75,39.675 ; v1(48.75,39.85) v1@48.75,39.675 ; D1.K@49.25,40.05 49.125,40.05 v1@48.75,39.675
  Bottom Layer w0.5: v1(48.75,39.85) 52.575,36.025 56.214,36.025 BZ1.1
SCK: J5.3 U1.15 | length 5.8
  Top Layer w0.2: U1.15 24.8,15.495 24.07,14.765 24.07,13.94 24.627,13.383 24.642,13.383 24.8,13.225 24.8,11.589 J5.3
SSEL: J5.6 U1.18 | length 4
  Top Layer w0.2: U1.18 26.215,18.15 26.65,17.715 26.65,16.057 J5.6
TX: J7.3 U1.20 | length 12.2
  Top Layer w0.2: U1.20 27.184,18.95 28.06,19.825 31.825,19.825 33.05,21.05 34.691,21.05 35.415,20.326 35.453,19.989 35.48,19.755 35.8,20.075 J7.3@35.8,20
UPDI: J6.3 U1.19 | length 7.7
  Top Layer w0.2: U1.19 27.35,18.55 28.142,19.342 31.249,19.342 31.857,18.734 31.857,18.425 32.225,18.425 J6.3@32.242,18.408
pads on no net: C1.0 C2.0 C3.0 C4.0 C5.0 C6.0 C7.0 C8.0 C9.0 C10.0 C11.0 C12.0 C13.0 D1.0 IC1.1 IC1.5 IC2.2 IC2.3 IC3.2 IC3.3 IC4.2 IC4.3 J5.drill LED1.0 LED1.B Q3.0 Q4.0 R1.0 R2.0 R3.0 R4.0 R5.0 R6.0 R7.0 R8.0 R9.0 R10.0 S1.1 U1.2 U1.14 U2.4

## Polygon pours and split planes (outlines as drawn)
GND on Top Layer "Top Layer-GND" (solid, remove dead copper, pour order 9): -0.003,-2.333 62.326,26.237 59.362,46.172 -0.638,46.172
PGND on Top Layer "Top Layer-PGND" (solid, remove dead copper, pour order 7): 0,40.15 0,23.266 35.318,23.266 35.318,44.232
AUX+ on Top Layer "Top Layer-AUX+" (solid, remove dead copper, pour order 0): 26.1,27.5 22.093,27.5 20.3,27.5 20.3,29.5 21.1,29.5 21.1,31.6 26.1,31.6
BAT+ on Top Layer "Top Layer-BAT+" (solid, pour order 3): 11.4,25 15.9,25 15.9,28.2 15.9,29.5 11.4,29.5
GND on Bottom Layer "Bottom Layer-GND" (solid, remove dead copper, pour order 12): 1.5,-0.5 61.371,26.289 58.224,45.314 1.5,38.024
PGND on Bottom Layer "Bottom Layer-PGND" (solid, remove dead copper, pour order 10): 1.55,23.075 36.775,23 34.175,42.9 0.863,37.677
PWR_OUT on Bottom Layer "Bottom Layer-PWR_OUT 1" (solid, remove dead copper, pour order 5): 15.925,24.225 20.175,24.225 20.175,28.825 19.675,29.325 19.675,31.825 16.587,31.825 16.587,29.187 15.925,28.525
BAT+ on Bottom Layer "Bottom Layer-BAT+ 1" (solid, remove dead copper, pour order 2): 11.4,25 11.4,29.5 15.9,29.5 15.9,28.2 15.9,25
AUX+ on Bottom Layer "Bottom Layer-AUX+" (solid, remove dead copper, pour order 1): 26.1,27.5 26.1,31.6 21.2,31.6 21.2,29.513 20.3,29.513 20.3,27.5

## Silkscreen, mask and mechanical layers (free items; w line width, h text height)
Mechanical 1:
  the board outline again, w0.1